# EAGLE board Audio_Jack_Interface (EAGLE 6.4)
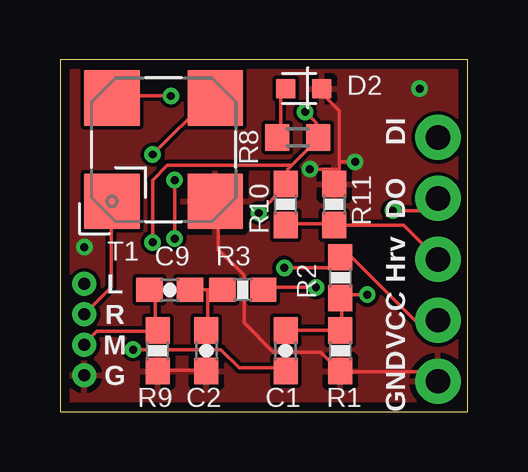
[diagram p0: board, top side]
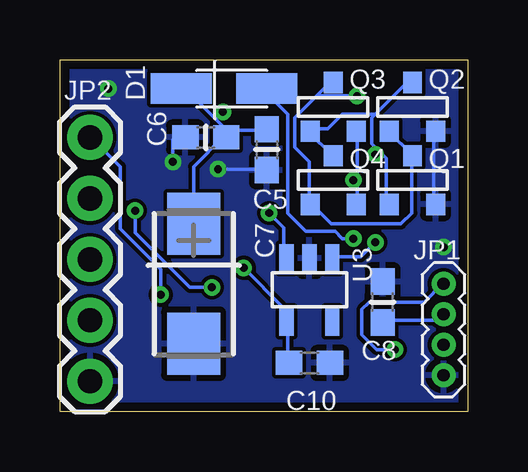
[diagram p1: board, bottom side, seen from below]

Size 17 x 14.66 mm. Coordinates in mm from the lower left corner, seen from the top.
Outline: 0,0 17,0 17,14.66 0,14.66 0,0
Copper layers (1*16): Top 0.0356mm / dielectric 1.5011mm / Bottom 0.0356mm
Design rules "LaenPCBOrder": minimum track width 6mil, minimum drill 13mil, track to track 6mil, track to pad 6mil, pad to pad 6mil, via to via 6mil, smd to smd 6mil, copper to edge 15mil, drill to drill 6mil, minimum pad ring 7mil, minimum via ring 7mil, stop-mask expansion 4mil, vias tented up to drill 13mil, thermal gap 10mil

## Footprints (pad centres in the part's own frame; a part is rotated, then mirrored left to right if it is on the bottom)
0603-CAP = smd 1.1 x 1: 1 -0.85,0; 2 0.85,0
C0603 = smd 1.1 x 1: 1 -0.85,0; 2 0.85,0
CT6032 = smd 2.6 x 2.2: + -2.5,0; - 2.5,0
MINIMELF = smd 2.54 x 1.27: A -1.778,0; C 1.778,0
LED-0603 = smd 0.8 x 0.8: A 0,-0.75; C 0,0.75
1X04-1.27MM = drill 0.508 pad 1: 1 0,0; 2 1.27,0; 3 2.54,0; 4 3.81,0
1X05 = drill 1.016 pad 1.88: 1 0,0; 2 2.54,0; 3 5.08,0; 4 7.62,0; 5 10.16,0
SOT-23 = smd 0.787 x 0.889: 1 0.025,-1.016; 2 -0.94,1.016; 3 0.991,1.016
0603-RES = smd 1.1 x 1: 1 -0.85,0; 2 0.85,0
R0603 = smd 1 x 1.1: 1 -0.85,0; 2 0.85,0
LPR6235 = smd 2.3 x 2.3: 1 -2.15,2.15; 2 -2.15,-2.15; 3 2.15,-2.15; 4 2.15,2.15
SOT23-5 = smd 0.6 x 1.2: 1 -0.95,-1.306; 2 0,-1.306; 3 0.95,-1.306; 4 0.95,1.306; 5 -0.95,1.306

## Placement (x,y rotation side)
C1  0.1 uF  [0603-CAP]  9.4,2.54 90 top
C2  4.7nF  [0603-CAP]  6.1,2.54 270 top
C5  1uF  [C0603]  8.38,10.92 270 bottom
C6  10uF  [C0603]  10.92,11.43 180 bottom
C7  CP6032  [CT6032]  11.43,5.33 270 bottom
C8  2.2u  [C0603]  3.56,4.57 90 bottom
C9  10uF  [0603-CAP]  4.57,5.08 180 top
C10  10u  [C0603]  6.6,2.03 0 bottom
D1  DIODE  [MINIMELF]  10.16,13.46 180 bottom
D2  [LED-0603]  10.16,13.46 270 top
JP1  [1X04-1.27MM]  1.02,1.52 90 bottom
JP2  [1X05]  15.75,1.27 90 bottom
Q1  [SOT-23]  2.29,9.65 180 bottom
Q2  [SOT-23]  2.29,12.7 180 bottom
Q3  [SOT-23]  5.59,12.7 180 bottom
Q4  [SOT-23]  5.59,9.65 180 bottom
R1  100k  [0603-RES]  11.68,2.54 90 top
R2  100k  [0603-RES]  11.68,5.59 90 top
R3  10k  [0603-RES]  7.62,5.08 0 top
R8  698  [R0603]  9.91,11.43 180 top
R9  1k  [0603-RES]  4.06,2.54 270 top
R10  3M  [0603-RES]  9.4,8.64 90 top
R11  1M  [0603-RES]  11.43,8.64 270 top
T1  LPR6235  [LPR6235]  4.32,10.92 90 top
U3  MIC5231  [SOT23-5]  6.6,5.08 180 bottom

## Library data of the parts
C1 C2 C9 R1-R3 R9-R11 = SparkFun
C5-C8 D1 D2 T1 = umich
C10 R8 = rcl
JP1 JP2 = SparkFun-Connectors
Q1-Q4 = zetex
U3 = berkeley-epic

## Nets
GND: C2.2 C5.2 C6.2 C7.- C8.2 C10.2 D2.C JP1.1 JP2.1 Q1.2 Q2.2 R1.1 R9.2 R11.1 T1.2 U3.2
LEFT: C1.1 JP1.4
MIC: C9.2 JP1.2 R9.1
N$1: C1.2 JP2.5 R1.2 R2.1
N$3: JP2.3 R10.1 R11.2
N$7: JP2.4 R3.2
N$8: Q1.1 Q2.3 Q3.1 Q4.3 T1.4
N$9: Q1.3 Q2.1 Q3.3 Q4.1 T1.3
N$11: D2.A R8.2
N$12: C2.1 C9.1 R3.1
N$17: D1.A Q3.2 Q4.2
RIGHT: C8.1 JP1.3 T1.1
VCC: C10.1 JP2.2 R2.2 U3.4
VHARVEST: C5.1 C6.1 C7.+ D1.C R8.1 R10.2 U3.1 U3.3

## Tracks (layer width: path | path; a pad name or v marks a point on that pad's centre or on a via)
GND  (via drill 0.33)
  Top 0.152: R9.2 4.17,1.73 5.99,1.73 C2.2 | 11.63,10.11 11.63,9.5 R11.1 | 11.63,10.11 11.63,10.41 | 11.63,10.41 11.63,12.55 10.72,13.46 D2.C | 11.63,10.41 v12.29,10.41 | v10.41,10.11 11.63,10.11 | T1.2 6.6,8.74 6.6,6.76 7.67,5.69 7.67,3.71 8.89,2.49 10.87,2.49 11.63,1.73 R1.1 11.73,1.68 15.39,1.68 15.7,1.37 JP2.1
  Bottom 0.152: Q1.2 1.42,8.74 1.42,11.63 Q2.2 | v12.29,10.41 12.29,11.33 C6.2 | v10.41,10.11 8.43,10.11 C5.2
  other vias: 14.99,13.46 1.02,6.86
  pour Bottom: 0,0 0,14.73 17.02,14.73 17.02,0
  pour Top: 0,0 0,14.73 17.02,14.73 17.02,0
LEFT  (via drill 0.33)
  Top 0.152: v3.05,2.59 6.71,2.59 7.47,1.83 9.3,1.83 C1.1
  Bottom 0.152: v3.05,2.59 3.81,2.59 4.42,3.2 4.42,4.27 4.12,4.57 1.83,4.57 1.07,5.33 JP1.4
MIC
  Top 0.152: C9.2 3.81,5.03 3.96,4.88 3.96,3.5 R9.1 3.96,3.35 1.52,3.35 1.07,2.9 JP1.2
N$1  (via drill 0.33)
  Top 0.152: C1.2 9.5,3.4 11.63,3.4 R1.2 11.73,3.5 11.73,4.72 R2.1 11.73,4.88 v12.8,4.88
  Bottom 0.152: v12.8,4.88 12.8,5.94 14.48,7.62 14.48,10.21 15.7,11.43 JP2.5
N$3
  Top 0.152: R10.1 9.5,7.82 11.63,7.82 R11.2 11.73,7.77 14.33,7.77 JP2.3
N$7  (via drill 0.33)
  Top 0.152: v10.67,5.18 8.53,5.18 R3.2 | v13.87,8.38 15.24,8.38 JP2.4
  Bottom 0.152: v10.67,5.18 11.58,5.18 13.87,7.47 v13.87,8.38
N$8  (via drill 0.33)
  Top 0.152: v4.62,13.16 2.18,13.16 T1.4
  Bottom 0.152: Q2.3 3.25,11.63 2.34,10.72 Q1.1 2.34,10.57 2.34,8.28 2.79,7.82 5.69,7.82 6.45,8.59 Q4.3 6.6,8.74 6.6,10.41 7.21,11.02 7.21,12.24 6.3,13.16 | 6.3,13.16 5.69,13.77 Q3.1 | 6.3,13.16 v4.62,13.16
N$9  (via drill 0.33)
  Top 0.152: v3.86,10.72 6.15,13.01 6.45,13.01 T1.3
  Bottom 0.152: Q4.1 5.69,10.72 6.6,11.63 Q3.3 6.45,11.79 5.84,11.79 5.23,12.39 3.86,12.39 | 3.71,10.87 4.01,11.18 4.01,12.24 3.86,12.39 | 3.71,10.87 3.4,10.57 3.4,8.74 Q1.3 | 3.86,12.39 2.64,13.61 2.34,13.61 Q2.1 | 3.71,10.87 v3.86,10.72
N$11
  Top 0.152: D2.A 9.2,13.46 9.2,11.48 R8.2
N$12
  Top 0.152: R3.1 6.15,5.08 | 6.15,5.08 C9.1 | 6.15,5.08 6.15,3.4 C2.1
N$17  (via drill 0.33)
  Top 0.152: v4.78,7.21 v4.78,9.65
  Bottom 0.152: 4.62,9.65 4.62,11.63 Q3.2 | 4.62,9.65 4.62,8.74 Q4.2 | v4.78,9.65 4.62,9.65 | v4.78,7.21 5.23,7.21 5.54,7.52 6.76,7.52 7.52,8.28 7.52,12.39 8.59,13.46 D1.A
RIGHT
  Top 0.152: JP1.3 2.13,5.18 2.13,8.69 T1.1
  Bottom 0.152: C8.1 3.5,3.81 1.22,3.81 1.07,3.96 JP1.3
VCC  (via drill 0.33)
  Top 0.152: v9.35,5.99 11.33,5.99 11.63,6.3 R2.2 11.73,6.4 12.19,6.4 14.78,3.81 JP2.2
  Bottom 0.152: C10.1 7.52,2.03 7.52,3.71 U3.4 7.67,3.86 7.67,4.32 v9.35,5.99
VHARVEST  (via drill 0.33)
  Top 0.152: 9.65,10.26 10.72,11.33 R8.1 10.67,11.43 10.67,12.04 v10.21,12.5 | 9.65,10.26 9.5,10.11 9.5,9.5 R10.2 9.35,9.35 v8.28,8.28 | v3.86,7.06 3.86,9.65 4.47,10.26 9.65,10.26
  Bottom 0.152: v3.86,7.06 4.47,6.45 5.54,6.45 U3.1 | v8.28,8.28 7.67,7.67 7.67,6.45 U3.3 | 9.91,11.58 10.06,11.43 C6.1 | 9.91,11.58 9.75,11.73 8.38,11.73 C5.1 | 10.52,12.19 11.89,13.56 D1.C | 10.52,12.19 9.91,11.58 | 9.91,11.58 C6.1 | C7.+ 11.43,10.21 10.21,11.43 C6.1 | 10.52,12.19 v10.21,12.5

## Text on the board
tNames: DI | DO | Hrv | L | R | VCC | M | G | GND